# Altium PCB R45_PCBM.PcbDoc (part 8 of 8)
Units mm, origin at the board's own origin, x right, y up, seen from the top; angles counter-clockwise.
Board outline 109 x 109 mm, 4 copper layers (Top Layer, Layer 1, Layer 2, Bottom Layer), stack 0.98 mm thick; 9 components, 0 nets, 14 pads, 1504 vias.
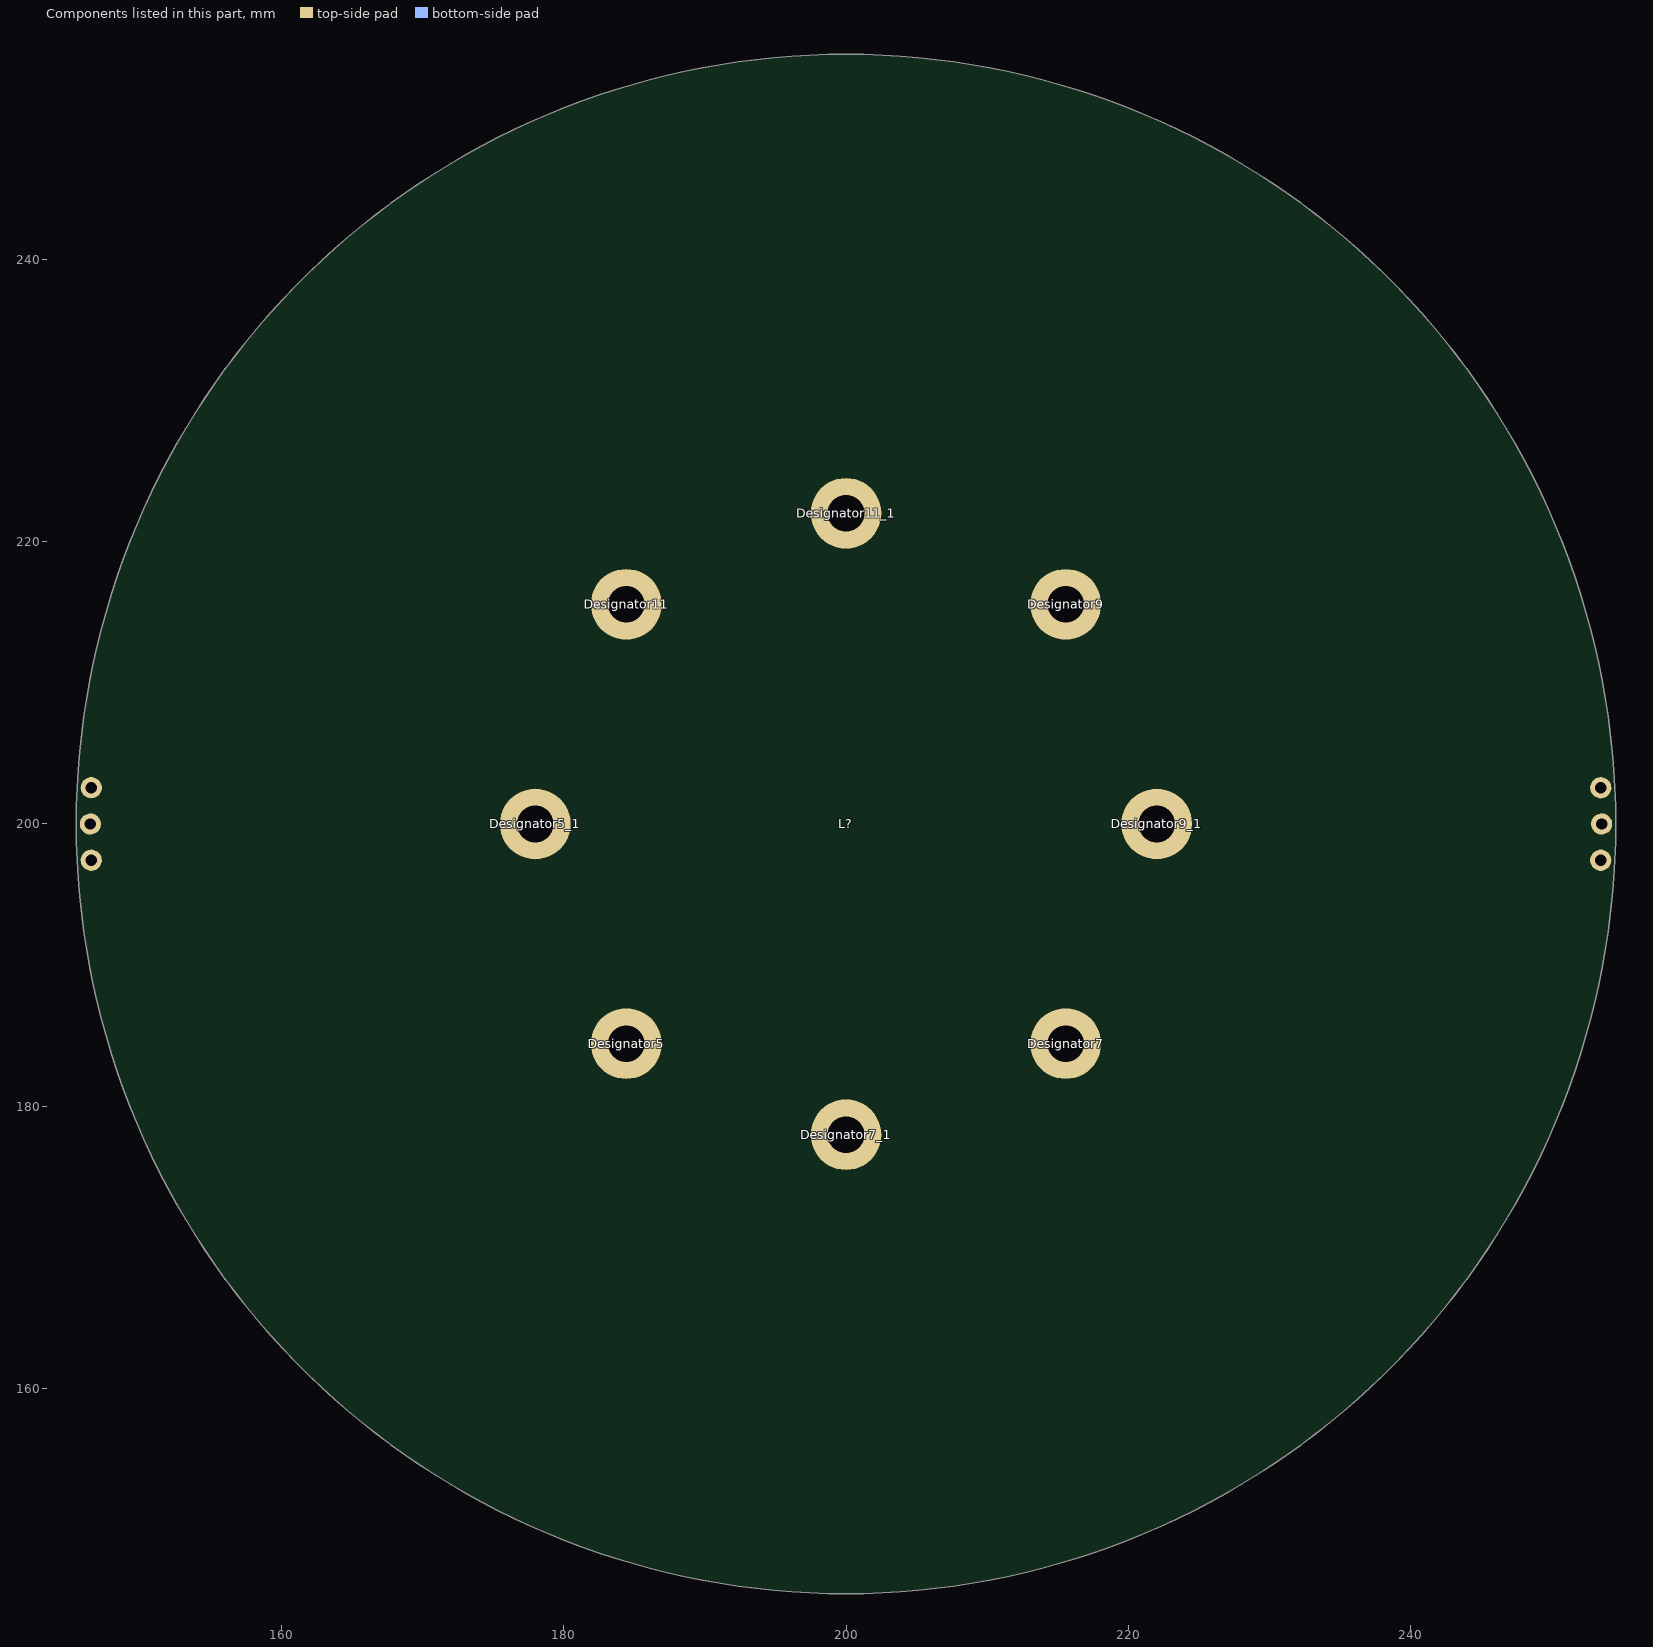
[diagram p10: the components of this part, seen from the top]

## Via types
v1: diameter 0.55, hole 0.2, Top Layer to Bottom Layer, 1440 vias
v2: diameter 0.7, hole 0.3, Top Layer to Bottom Layer, 64 vias

## Nets (pads, with @x,y where several pads share a name; then routed paths per layer and width w, separated by ;. In a path a pad name is that pad's centre, name@x,y a point inside that pad or via, vN(x,y) a via of type N, cw(c..) or ccw(c..) an arc to the next point about the centre after c; other vN are vias at no path point) (continued)
copper on no net:
  other v1: 198.902,154.263 199.501,154.253 200.499,154.253 201.098,154.263 197.905,154.298 202.095,154.298 197.307,154.329 202.693,154.329 196.311,154.399 203.689,154.399 195.714,154.451 204.286,154.451 199.206,154.507 200.794,154.507 194.722,154.556 197.619,154.562 202.381,154.562 205.278,154.556 194.127,154.629 205.873,154.629 196.034,154.673 203.966,154.673 193.139,154.767 198.914,154.763 199.506,154.753 200.494,154.752 201.086,154.763 206.861,154.767 197.928,154.798 202.072,154.797 194.455,154.839 197.336,154.828 202.664,154.829 205.545,154.839 192.548,154.861 207.452,154.861 196.351,154.897 203.649,154.897 195.761,154.949 204.239,154.949 191.565,155.034 194.779,155.052 205.221,155.052 208.435,155.034 192.882,155.06 207.118,155.06 194.192,155.124 205.808,155.124 190.977,155.149 209.023,155.149 193.214,155.262 206.786,155.261 190,155.356 191.318,155.336 192.629,155.354 207.371,155.354 208.682,155.336 210,155.356 189.417,155.491 210.583,155.491 191.657,155.526 208.343,155.525 191.075,155.638 208.925,155.639 189.765,155.666 210.235,155.666 188.449,155.732 211.551,155.732 190.11,155.844 209.89,155.844 187.87,155.887 212.13,155.887 189.533,155.977 210.467,155.977 188.224,156.05 211.776,156.05 186.911,156.163 213.089,156.163 188.575,156.216 211.425,156.216 186.338,156.338 213.662,156.338 188.003,156.369 211.997,156.37 186.697,156.488 213.303,156.488 185.389,156.646 187.054,156.642 212.946,156.641 214.611,156.646 186.487,156.814 213.513,156.815 184.822,156.841 215.178,156.841 185.187,156.979 214.813,156.979 185.548,157.12 214.452,157.119 183.885,157.182 216.115,157.182 184.988,157.312 215.012,157.313 183.326,157.397 216.674,157.397 183.694,157.522 216.306,157.522 184.061,157.65 215.939,157.65 182.4,157.771 217.6,157.771 183.508,157.862 216.492,157.863 181.849,158.005 218.151,158.005 182.222,158.117 217.778,158.117 182.592,158.232 217.408,158.232 180.937,158.411 219.063,158.411 182.047,158.463 217.953,158.464 180.394,158.664 219.606,158.664 180.771,158.763 219.229,158.763 181.145,158.865 218.855,158.865 179.497,159.101 180.608,159.115 219.391,159.116 220.503,159.101 178.964,159.373 221.036,159.373 179.343,159.459 220.657,159.459 179.721,159.548 220.279,159.548 179.193,159.817 220.806,159.817 178.082,159.842 221.918,159.842 177.559,160.132 222.441,160.132 177.941,160.204 222.059,160.204 178.322,160.281 221.678,160.28 177.804,160.568 222.196,160.568 176.694,160.631 223.306,160.631 176.181,160.94 223.819,160.94 176.566,160.999 223.434,160.999 176.949,161.062 223.051,161.061 176.441,161.366 223.559,161.367 175.334,161.469 224.666,161.469 174.832,161.795 225.168,161.795 175.219,161.84 224.781,161.84 175.604,161.89 224.396,161.889 175.107,162.212 224.893,162.212 174.005,162.353 225.995,162.353 173.514,162.696 226.486,162.696 173.902,162.728 226.098,162.728 174.289,162.764 225.711,162.764 173.803,163.104 226.196,163.104 172.707,163.283 227.293,163.283 172.228,163.643 172.617,163.662 227.383,163.662 227.772,163.643 173.005,163.684 226.995,163.684 172.532,164.04 227.468,164.041 171.442,164.258 228.558,164.258 170.977,164.635 171.366,164.64 171.754,164.649 228.246,164.648 228.634,164.64 229.023,164.635 171.293,165.021 228.706,165.021 170.212,165.276 229.788,165.276 169.76,165.669 170.149,165.66 170.538,165.656 229.463,165.656 229.851,165.66 230.24,165.669 170.09,166.044 229.909,166.044 169.018,166.337 230.982,166.337 169.357,166.705 230.643,166.705 168.969,166.723 231.031,166.723 168.58,166.746 231.42,166.746 168.923,167.109 231.076,167.109 167.862,167.439 232.138,167.439 168.214,167.795 231.787,167.794 167.826,167.826 232.174,167.826 167.439,167.862 232.561,167.862 167.794,168.213 232.205,168.214 166.746,168.58 233.254,168.58 167.109,168.924 232.891,168.923 166.723,168.969 233.277,168.969 166.337,169.018 233.663,169.018 166.705,169.357 233.295,169.357 165.669,169.76 234.331,169.76 199.475,169.905 200.526,169.905 198.425,169.941 201.576,169.941 197.377,170.015 202.624,170.015 166.044,170.091 233.956,170.09 196.332,170.124 203.669,170.124 165.66,170.149 234.34,170.149 165.276,170.212 234.724,170.212 195.292,170.271 204.709,170.271 199.482,170.305 200.519,170.305 198.446,170.341 201.555,170.341 197.412,170.413 202.589,170.413 194.257,170.453 205.744,170.453 196.381,170.521 203.62,170.521 165.656,170.537 234.344,170.538 193.229,170.671 195.354,170.666 204.647,170.666 206.771,170.672 199.489,170.705 200.512,170.705 198.467,170.74 201.534,170.74 197.447,170.812 202.554,170.812 194.333,170.846 205.667,170.846 192.21,170.926 196.43,170.918 203.571,170.918 207.791,170.926 164.635,170.977 235.365,170.977 193.319,171.061 195.417,171.061 204.584,171.061 206.681,171.061 191.2,171.215 208.801,171.215 194.41,171.238 205.591,171.238 165.021,171.294 234.979,171.293 192.313,171.312 207.687,171.312 164.64,171.366 235.36,171.366 164.258,171.442 193.409,171.451 206.591,171.451 235.742,171.442 190.201,171.54 209.8,171.54 191.317,171.598 208.684,171.598 192.417,171.698 207.584,171.699 164.648,171.754 235.351,171.754 189.214,171.899 190.331,171.918 209.67,171.918 210.787,171.899 191.434,171.98 208.567,171.98 163.643,172.228 236.357,172.228 189.357,172.273 210.644,172.273 188.239,172.293 190.461,172.296 209.54,172.296 211.761,172.293 164.041,172.532 235.96,172.532 163.662,172.617 236.338,172.617 189.5,172.646 210.5,172.646 188.396,172.661 211.605,172.661 163.283,172.707 236.717,172.707 187.28,172.72 212.721,172.72 163.684,173.005 236.316,173.005 188.552,173.029 211.449,173.029 187.449,173.083 212.552,173.083 186.335,173.181 213.665,173.181 187.618,173.445 212.383,173.445 162.696,173.514 237.304,173.514 186.517,173.537 213.484,173.537 185.407,173.674 214.593,173.674 163.104,173.804 236.896,173.803 186.698,173.893 213.302,173.894 162.728,173.902 237.272,173.902 162.353,174.005 185.601,174.024 214.399,174.024 237.647,174.005 184.498,174.199 215.503,174.199 162.764,174.289 237.236,174.289 185.795,174.374 214.205,174.374 184.704,174.542 215.297,174.542 183.607,174.756 216.394,174.756 161.795,174.832 238.205,174.832 184.91,174.885 215.091,174.885 183.825,175.091 216.176,175.092 162.212,175.107 237.788,175.107 161.84,175.219 238.16,175.219 161.469,175.334 182.736,175.343 217.265,175.344 238.531,175.334 184.042,175.427 215.958,175.427 161.889,175.604 238.11,175.604 182.965,175.671 217.036,175.671 181.886,175.961 218.115,175.961 183.195,175.999 216.806,175.999 160.94,176.181 239.06,176.181 182.126,176.28 217.874,176.281 238.634,176.441 161.367,176.441 160.999,176.566 239.001,176.566 181.058,176.608 182.367,176.6 217.634,176.6 218.943,176.608 160.631,176.694 239.369,176.694 181.309,176.919 218.691,176.919 161.061,176.949 238.938,176.949 181.561,177.23 218.439,177.23 180.253,177.283 219.747,177.283 160.132,177.559 239.868,177.559 180.515,177.585 219.485,177.585 160.568,177.804 239.432,177.804 180.778,177.887 219.223,177.887 160.204,177.941 239.796,177.941 179.472,177.986 220.528,177.987 159.842,178.082 240.158,178.082 179.745,178.279 220.256,178.279 160.28,178.322 239.719,178.322 180.018,178.571 219.983,178.572 178.716,178.716 221.284,178.716 159.373,178.964 240.627,178.964 178.999,178.999 221.001,178.999 159.817,179.194 240.183,179.193 179.282,179.282 220.719,179.282 159.459,179.343 240.541,179.343 177.987,179.472 222.014,179.472 159.101,179.497 240.899,179.497 159.548,179.721 240.452,179.721 178.279,179.744 221.721,179.745 178.572,180.017 221.429,180.018 177.283,180.253 222.717,180.253 158.664,180.394 241.336,180.394 177.585,180.515 222.415,180.515 159.116,180.609 240.885,180.608 158.763,180.771 177.887,180.777 222.113,180.778 241.237,180.771 158.411,180.937 241.589,180.937 176.608,181.057 223.392,181.058 158.865,181.145 241.135,181.145 176.919,181.309 223.081,181.309 177.23,181.561 222.77,181.561 158.005,181.849 241.995,181.849 175.961,181.885 224.039,181.886 158.464,182.047 241.537,182.047 176.281,182.126 223.72,182.126 158.117,182.222 241.883,182.222 176.6,182.366 223.4,182.367 157.771,182.4 242.229,182.4 158.232,182.592 241.768,182.592 175.344,182.735 224.657,182.736 175.671,182.964 224.329,182.965 175.999,183.194 224.001,183.195 157.397,183.326 242.603,183.326 157.863,183.508 242.138,183.508 174.756,183.606 225.244,183.607 157.522,183.694 242.478,183.694 175.092,183.824 224.909,183.825 157.182,183.885 242.818,183.885 157.65,184.061 175.427,184.042 224.573,184.042 242.35,184.061 174.199,184.497 225.801,184.498 174.542,184.703 225.458,184.704 156.841,184.822 243.159,184.822 174.885,184.909 225.115,184.91 157.313,184.988 242.688,184.988 156.979,185.187 243.021,185.187 156.646,185.389 173.674,185.407 243.354,185.389 226.326,185.407 157.119,185.548 242.88,185.548 174.024,185.601 225.976,185.601 174.374,185.795 225.626,185.795 156.338,186.338 173.181,186.335 226.819,186.335 243.662,186.338 156.815,186.487 243.186,186.487 173.537,186.516 226.463,186.517 156.488,186.697 173.894,186.698 226.107,186.698 243.512,186.697 156.163,186.911 243.837,186.911 156.641,187.054 243.358,187.054 172.72,187.279 227.28,187.28 173.083,187.448 226.917,187.449 173.445,187.617 226.555,187.618 155.887,187.87 244.113,187.87 156.37,188.003 243.631,188.003 156.05,188.224 243.95,188.224 172.293,188.239 227.707,188.239 172.661,188.395 227.339,188.396 155.732,188.449 244.268,188.449 173.029,188.551 226.971,188.552 156.216,188.575 243.784,188.575 171.899,189.213 228.101,189.214 172.273,189.356 227.727,189.357 155.491,189.417 244.509,189.417 172.646,189.5 227.354,189.5 155.977,189.533 244.023,189.533 155.666,189.765 244.334,189.765 155.356,190 244.644,190 155.844,190.11 244.156,190.11 171.54,190.2 228.46,190.201 171.918,190.33 228.082,190.331 172.296,190.46 227.704,190.461 155.149,190.977 244.851,190.977 155.639,191.075 244.362,191.075 171.215,191.199 228.785,191.2 155.336,191.318 171.598,191.316 228.402,191.317 244.664,191.318 171.98,191.433 228.02,191.434 155.034,191.565 244.966,191.565 155.525,191.657 244.474,191.657 170.926,192.209 229.074,192.21 171.312,192.313 228.688,192.313 171.699,192.416 228.302,192.417 154.861,192.548 245.139,192.548 155.354,192.629 244.646,192.629 155.06,192.882 244.94,192.882 154.767,193.139 245.233,193.139 155.261,193.214 170.672,193.229 229.329,193.229 244.738,193.214 171.061,193.319 228.939,193.319 171.451,193.409 228.549,193.409 154.629,194.127 245.371,194.127 155.124,194.192 244.876,194.192 170.453,194.256 229.547,194.257 170.846,194.333 229.154,194.333 171.238,194.409 228.762,194.41 154.839,194.455 245.161,194.455 154.556,194.722 245.444,194.722 155.052,194.779 244.948,194.779 170.271,195.291 229.729,195.292 170.666,195.353 229.334,195.354 171.061,195.416 228.939,195.417 154.451,195.714 245.549,195.714 154.949,195.761 245.051,195.761 154.673,196.034 245.327,196.034 154.399,196.311 245.601,196.311 154.897,196.351 170.124,196.331 229.876,196.332 245.103,196.351 170.521,196.38 229.479,196.381 170.918,196.429 229.082,196.43 154.329,197.307 245.671,197.307 154.829,197.336 245.172,197.336 170.015,197.376 229.985,197.377 170.413,197.411 229.587,197.412 170.812,197.446 229.188,197.447 154.562,197.619 245.438,197.619 154.298,197.905 154.797,197.928 245.202,197.928 245.702,197.905 169.941,198.424 230.059,198.425 170.341,198.445 229.659,198.446 170.74,198.466 229.26,198.467 154.263,198.902 154.763,198.914 245.237,198.914 245.737,198.902 154.507,199.206 245.493,199.206 169.905,199.474 230.095,199.475 154.253,199.501 170.305,199.481 170.705,199.488 229.295,199.489 229.695,199.482 245.747,199.501 154.752,199.506 245.247,199.506 154.753,200.494 245.248,200.494 154.253,200.499 170.305,200.518 170.705,200.511 229.295,200.512 229.695,200.519 245.747,200.499 169.905,200.525 230.095,200.526 154.507,200.794 245.493,200.794 154.263,201.098 154.763,201.086 245.237,201.086 245.737,201.098 170.74,201.533 229.26,201.534 170.341,201.554 229.659,201.555 169.941,201.575 230.059,201.576 154.798,202.072 245.203,202.072 154.298,202.095 245.702,202.095 154.562,202.381 245.438,202.381 170.812,202.553 229.188,202.554 170.413,202.588 229.587,202.589 170.015,202.623 229.985,202.624 154.828,202.664 245.171,202.664 154.329,202.693 245.671,202.693 170.918,203.57 229.082,203.571 170.521,203.619 229.479,203.62 154.897,203.649 170.124,203.668 229.876,203.669 245.103,203.649 154.399,203.689 245.601,203.689 154.673,203.966 245.327,203.966 154.949,204.239 245.051,204.239 154.451,204.286 245.549,204.286 171.061,204.583 228.939,204.584 170.666,204.646 229.334,204.647 170.271,204.708 229.729,204.709 155.052,205.221 244.948,205.221 154.556,205.278 245.444,205.278 154.839,205.545 245.161,205.545 171.238,205.59 228.762,205.591 170.846,205.667 229.154,205.667 170.453,205.743 229.547,205.744 155.124,205.808 244.876,205.808 154.629,205.873 245.371,205.873 171.451,206.591 228.549,206.591 171.061,206.681 228.939,206.681 155.262,206.786 170.671,206.771 229.328,206.771 244.739,206.786 154.767,206.861 245.233,206.861 155.06,207.118 244.94,207.118 155.354,207.371 244.646,207.371 154.861,207.452 245.139,207.452 171.698,207.583 228.301,207.584 171.312,207.687 228.688,207.687 170.926,207.79 229.074,207.791 155.526,208.343 244.475,208.343 155.034,208.435 244.966,208.435 171.98,208.566 228.02,208.567 155.336,208.682 171.598,208.683 228.402,208.684 244.664,208.682 171.215,208.8 228.785,208.801 155.638,208.925 244.361,208.925 155.149,209.023 244.851,209.023 172.296,209.539 227.703,209.54 171.918,209.669 228.082,209.67 171.54,209.799 228.46,209.8 155.844,209.89 244.156,209.89 155.356,210 244.644,210 155.666,210.235 244.334,210.235 155.977,210.467 244.023,210.467 172.646,210.5 227.354,210.5 155.491,210.583 244.509,210.583 172.273,210.643 227.727,210.644 171.899,210.786 228.101,210.787 156.216,211.425 243.784,211.425 173.029,211.448 226.971,211.449 155.732,211.551 244.268,211.551 172.661,211.604 227.339,211.605 172.293,211.761 227.707,211.761 156.05,211.776 243.95,211.776 156.369,211.997 243.63,211.997 155.887,212.13 244.113,212.13 173.445,212.382 226.555,212.383 173.083,212.551 226.917,212.552 172.72,212.72 227.28,212.721 156.642,212.946 243.359,212.946 156.163,213.089 243.837,213.089 156.488,213.303 173.893,213.302 226.106,213.302 243.512,213.303 173.537,213.483 226.463,213.484 156.814,213.513 243.185,213.513 156.338,213.662 173.181,213.665 226.819,213.665 243.662,213.662 174.374,214.205 225.626,214.205 174.024,214.399 225.976,214.399 157.12,214.452 242.881,214.452 156.646,214.611 173.674,214.593 226.326,214.593 243.354,214.611 156.979,214.813 243.021,214.813 157.312,215.012 242.687,215.012 174.885,215.09 225.115,215.091 156.841,215.178 243.159,215.178 174.542,215.296 225.458,215.297 174.199,215.502 225.801,215.503 157.65,215.939 175.427,215.958 224.573,215.958 242.35,215.939 157.182,216.115 242.818,216.115 175.091,216.175 224.908,216.176 157.522,216.306 242.478,216.306 174.756,216.393 225.244,216.394 157.862,216.492 242.137,216.492 157.397,216.674 242.603,216.674 175.999,216.805 224.001,216.806 175.671,217.035 224.329,217.036 175.343,217.264 224.656,217.265 158.232,217.408 241.768,217.408 157.771,217.6 242.229,217.6 176.6,217.633 223.4,217.634 158.117,217.778 241.883,217.778 176.28,217.874 223.719,217.874 158.463,217.953 241.536,217.953 175.961,218.114 224.039,218.115 158.005,218.151 241.995,218.151 177.23,218.439 222.77,218.439 176.919,218.691 223.081,218.691 158.865,218.855 241.135,218.855 176.608,218.942 223.392,218.943 158.411,219.063 241.589,219.063 158.763,219.229 177.887,219.222 222.113,219.223 241.237,219.229 159.115,219.392 240.884,219.391 177.585,219.485 222.415,219.485 158.664,219.606 241.336,219.606 177.283,219.747 222.717,219.747 178.571,219.982 221.428,219.983 178.279,220.255 221.721,220.256 159.548,220.279 240.452,220.279 159.101,220.503 240.899,220.503 177.986,220.528 222.013,220.528 159.459,220.657 240.541,220.657 179.281,220.718 220.718,220.718 159.817,220.807 240.183,220.806 178.999,221.001 221.001,221.001 159.373,221.036 240.627,221.036 178.716,221.284 221.284,221.284 180.017,221.428 219.982,221.429 160.281,221.678 239.72,221.678 179.744,221.721 220.255,221.721 159.842,221.918 240.158,221.918 179.472,222.013 220.528,222.014 160.204,222.059 239.796,222.059 180.777,222.113 219.222,222.113 160.568,222.196 239.432,222.196 180.515,222.415 219.485,222.415 160.132,222.441 239.868,222.441 180.253,222.717 219.747,222.717 181.561,222.77 218.439,222.77 161.062,223.051 238.939,223.051 181.309,223.081 218.691,223.081 160.631,223.306 239.369,223.306 181.057,223.392 182.366,223.4 217.633,223.4 218.942,223.392 160.999,223.434 239.001,223.434 161.366,223.559 238.633,223.559 182.126,223.719 217.874,223.72 160.94,223.819 239.06,223.819 183.194,224.001 216.805,224.001 181.885,224.039 218.114,224.039 182.964,224.329 217.035,224.329 161.89,224.396 238.111,224.396 184.042,224.573 215.958,224.573 161.469,224.666 182.735,224.656 217.264,224.657 238.531,224.666 161.84,224.781 238.16,224.781 162.212,224.893 237.788,224.893 183.824,224.908 216.175,224.909 184.909,225.115 215.09,225.115 161.795,225.168 238.205,225.168 183.606,225.244 216.393,225.244 184.703,225.458 215.296,225.458 185.795,225.626 214.205,225.626 162.764,225.711 237.236,225.711 184.497,225.801 215.502,225.801 162.353,225.995 185.601,225.976 214.399,225.976 237.647,225.995 162.728,226.098 237.272,226.098 186.698,226.106 213.302,226.107 163.104,226.197 236.896,226.196 185.407,226.326 214.593,226.326 186.516,226.463 213.483,226.463 162.696,226.486 237.304,226.486 187.617,226.555 212.382,226.555 186.335,226.819 213.665,226.819 187.448,226.917 212.551,226.917 188.551,226.971 211.448,226.971 163.684,226.995 236.316,226.995 187.279,227.28 212.72,227.28 163.283,227.293 236.717,227.293 188.395,227.339 211.604,227.339 189.5,227.354 210.5,227.354 163.662,227.383 236.338,227.383 164.04,227.468 235.959,227.468 188.239,227.707 190.46,227.703 209.539,227.704 211.761,227.707 189.356,227.727 210.643,227.727 163.643,227.772 236.357,227.772 191.433,228.02 208.566,228.02 189.213,228.101 190.33,228.082 209.669,228.082 210.786,228.101 164.649,228.246 235.352,228.246 192.416,228.301 207.583,228.302 191.316,228.402 208.683,228.402 190.2,228.46 209.799,228.46 164.258,228.558 193.409,228.549 206.591,228.549 235.742,228.558 164.64,228.634 235.36,228.634 192.313,228.688 207.686,228.688 165.021,228.707 234.979,228.706 194.409,228.762 205.59,228.762 191.199,228.785 208.8,228.785 193.319,228.939 195.416,228.939 204.583,228.939 206.681,228.939 164.635,229.023 235.365,229.023 192.209,229.074 196.429,229.082 203.57,229.082 207.79,229.074 194.333,229.154 205.667,229.154 197.446,229.188 202.553,229.188 198.466,229.26 201.533,229.26 199.488,229.295 200.511,229.295 193.229,229.328 195.353,229.334 204.646,229.334 206.771,229.329 165.656,229.462 234.344,229.463 196.38,229.479 203.619,229.479 194.256,229.547 205.743,229.547 197.411,229.587 202.588,229.587 198.445,229.659 201.554,229.659 199.481,229.695 200.518,229.695 195.291,229.729 204.708,229.729 165.276,229.788 234.724,229.788 165.66,229.851 234.34,229.851 196.331,229.876 203.668,229.876 166.044,229.91 233.956,229.909 197.376,229.985 202.623,229.985 198.424,230.059 201.575,230.059 199.474,230.095 200.525,230.095 165.669,230.24 234.331,230.24 166.705,230.643 233.295,230.643 166.337,230.982 233.663,230.982 166.723,231.031 233.277,231.031 232.891,231.076 167.109,231.077 166.746,231.42 233.254,231.42 167.795,231.786 232.206,231.787 167.439,232.138 232.561,232.138 167.826,232.174 232.174,232.174 168.213,232.206 231.786,232.205 167.862,232.561 232.138,232.561 168.924,232.891 231.077,232.891 168.58,233.254 231.42,233.254 168.969,233.277 231.031,233.277 169.357,233.295 230.643,233.295 169.018,233.663 230.982,233.663 170.091,233.956 229.91,233.956 169.76,234.331 170.149,234.34 170.537,234.344 229.462,234.344 229.851,234.34 230.24,234.331 170.212,234.724 229.788,234.724 171.294,234.979 228.707,234.979 170.977,235.365 171.366,235.36 171.754,235.352 228.246,235.351 228.634,235.36 229.023,235.365 171.442,235.742 228.558,235.742 172.532,235.959 227.468,235.96 173.005,236.316 226.995,236.316 172.228,236.357 172.617,236.338 227.383,236.338 227.772,236.357 172.707,236.717 227.293,236.717 173.804,236.896 226.197,236.896 174.289,237.236 225.711,237.236 173.902,237.272 226.098,237.272 173.514,237.304 226.486,237.304 174.005,237.647 225.995,237.647 175.107,237.788 224.893,237.788 175.604,238.111 224.396,238.11 175.219,238.16 224.781,238.16 174.832,238.205 225.168,238.205 175.334,238.531 224.666,238.531 176.441,238.633 223.559,238.634 176.949,238.939 223.051,238.938 176.566,239.001 223.434,239.001 176.181,239.06 223.819,239.06 176.694,239.369 223.306,239.369 177.804,239.432 222.196,239.432 178.322,239.72 221.678,239.719 177.941,239.796 222.059,239.796 177.559,239.868 222.441,239.868 178.082,240.158 221.918,240.158 179.194,240.183 220.807,240.183 179.721,240.452 220.279,240.452 179.343,240.541 220.657,240.541 178.964,240.627 221.036,240.627 179.497,240.899 180.609,240.884 219.392,240.885 220.503,240.899 218.855,241.135 181.145,241.135 180.771,241.237 219.229,241.237 180.394,241.336 219.606,241.336 182.047,241.536 217.953,241.537 180.937,241.589 219.063,241.589 182.592,241.768 217.408,241.768 182.222,241.883 217.778,241.883 181.849,241.995 218.151,241.995 183.508,242.137 216.492,242.138 182.4,242.229 217.6,242.229 184.061,242.35 215.939,242.35 183.694,242.478 216.306,242.478 183.326,242.603 216.674,242.603 184.988,242.687 215.012,242.688 183.885,242.818 216.115,242.818 185.548,242.881 214.452,242.88 185.187,243.021 214.813,243.021 184.822,243.159 215.178,243.159 186.487,243.185 213.513,243.186 185.389,243.354 187.054,243.359 212.946,243.358 214.611,243.354 186.697,243.512 213.303,243.512 188.003,243.63 211.997,243.631 186.338,243.662 213.662,243.662 188.575,243.784 211.425,243.784 186.911,243.837 213.089,243.837 188.224,243.95 211.776,243.95 189.533,244.023 210.467,244.023 187.87,244.113 212.13,244.113 190.11,244.156 209.89,244.156 188.449,244.268 211.551,244.268 189.765,244.334 210.235,244.334 191.075,244.361 208.925,244.362 191.657,244.475 208.343,244.474 189.417,244.509 210.583,244.509 190,244.644 191.318,244.664 192.629,244.646 207.371,244.646 208.682,244.664 210,244.644 193.214,244.739 206.786,244.738 190.977,244.851 209.023,244.851 194.192,244.876 205.808,244.876 192.882,244.94 207.118,244.94 191.565,244.966 194.779,244.948 205.221,244.948 208.435,244.966 195.761,245.051 204.239,245.051 196.351,245.103 203.649,245.103 192.548,245.139 207.452,245.139 194.455,245.161 197.336,245.171 202.664,245.172 205.545,245.161 197.928,245.203 202.072,245.202 193.139,245.233 198.914,245.237 199.506,245.248 200.494,245.247 201.086,245.237 206.861,245.233 196.034,245.327 203.966,245.327 194.127,245.371 205.873,245.371 194.722,245.444 197.619,245.438 202.381,245.438 205.278,245.444 199.206,245.493 200.794,245.493 195.714,245.549 204.286,245.549 196.311,245.601 203.689,245.601 197.307,245.671 202.693,245.671 197.905,245.702 202.095,245.702 198.902,245.737 199.501,245.747 200.499,245.747 201.098,245.737
  other v2: 200,176.1 198.657,176.657 201.344,176.657 198.1,178 201.9,178 198.657,179.344 201.344,179.344 200,179.9 184.444,182.544 215.556,182.544 183.1,183.1 185.787,183.1 214.213,183.1 216.9,183.1 182.544,184.444 186.344,184.444 213.656,184.444 217.456,184.444 183.1,185.787 185.787,185.787 214.213,185.787 216.9,185.787 184.444,186.344 215.556,186.344 178,198.1 222,198.1 176.657,198.657 179.344,198.657 220.657,198.657 223.344,198.657 176.1,200 179.9,200 220.1,200 223.9,200 176.657,201.344 179.344,201.344 220.657,201.344 223.344,201.344 178,201.9 222,201.9 184.444,213.656 215.556,213.657 183.1,214.213 185.787,214.213 214.213,214.213 216.9,214.213 182.544,215.556 186.344,215.556 213.656,215.557 217.456,215.557 183.1,216.9 185.787,216.9 214.213,216.9 216.9,216.9 184.444,217.456 215.556,217.457 200,220.1 198.657,220.657 201.344,220.657 198.1,222 201.9,222 198.657,223.344 201.344,223.344 200,223.9

## Silkscreen, mask and mechanical layers (free items; w line width, h text height)
Top Overlay:
  drawing of 10 lines, arcs and shapes, not listed
  text "A'" at 148.261,203.15 h1 r270
  text "C" at 251.738,202.234 h1 r90
  text "B'" at 148.2,200.583 h1 r270
  text "B" at 251.8,199.667 h1 r90
  text "C'" at 148.261,198.017 h1 r270
  text "A" at 251.738,197.1 h1 r90
  text ".PCB_Revision" at 193.835,147.583 h1
Mechanical 1:
  circle w0.2: c200,200 r18.5

## Text inside footprints (layer, text, board x,y; h text height)
L?: Top Overlay "c" at 178.961,166.299 h2 r331; Top Overlay "C" at 191.756,161.136 h2 r351; Top Overlay "C" at 168.703,175.527 h2 r311; Top Overlay "a" at 218.667,164.929 h2 r31; Top Overlay "A" at 229.536,173.429 h2 r51; Top Overlay "A" at 205.546,160.66 h2 r11; Top Overlay "b" at 239.706,198.63 h2 r91; Top Overlay "B" at 237.779,212.293 h2 r111; Top Overlay "B" at 236.843,185.133 h2 r71; Top Overlay "c" at 221.039,233.701 h2 r151; Top Overlay "C" at 208.244,238.864 h2 r171; Top Overlay "C" at 231.297,224.473 h2 r131; Top Overlay "a" at 181.334,235.071 h2 r211; Top Overlay "A" at 170.464,226.572 h2 r231; Top Overlay "A" at 194.454,239.34 h2 r191; Top Overlay "b" at 160.295,201.37 h2 r271; Top Overlay "B" at 162.22,187.707 h2 r291; Top Overlay "B" at 163.158,214.867 h2 r251